# EAGLE board yaokewang_hw2_sch (EAGLE 9.3.0)
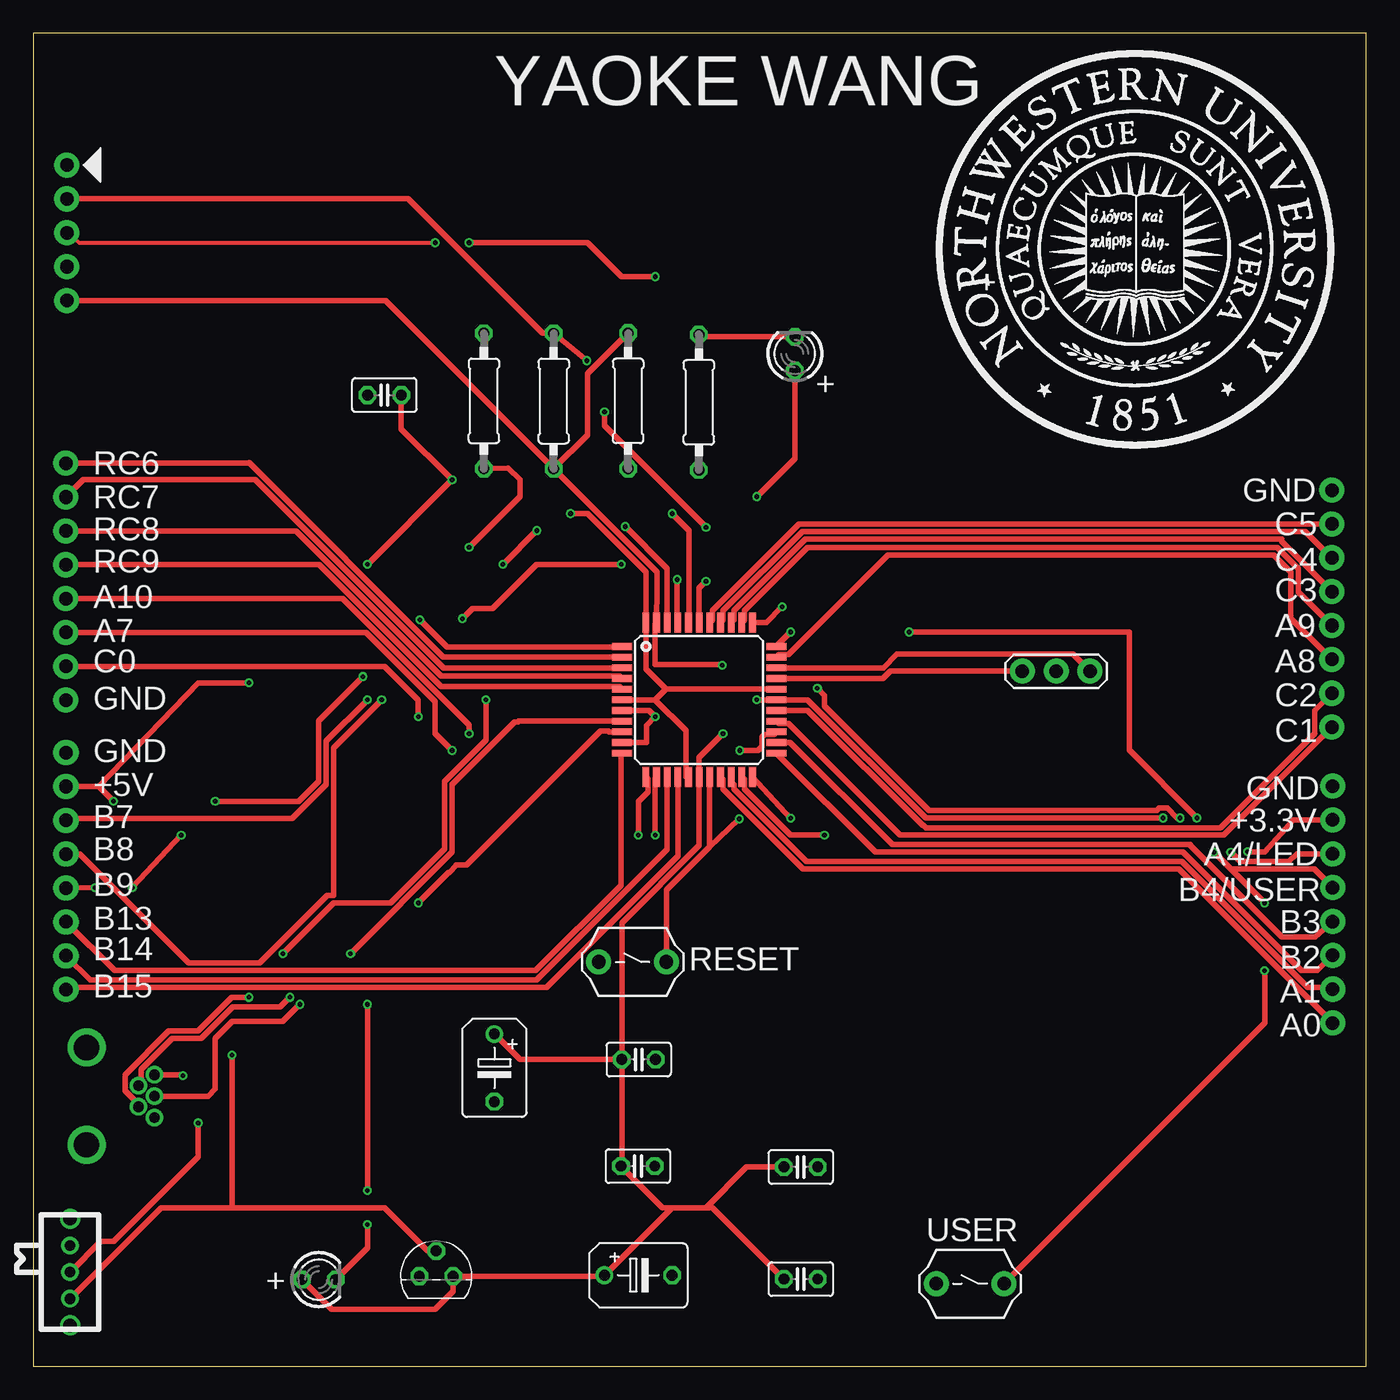
[diagram p0: board, top side]
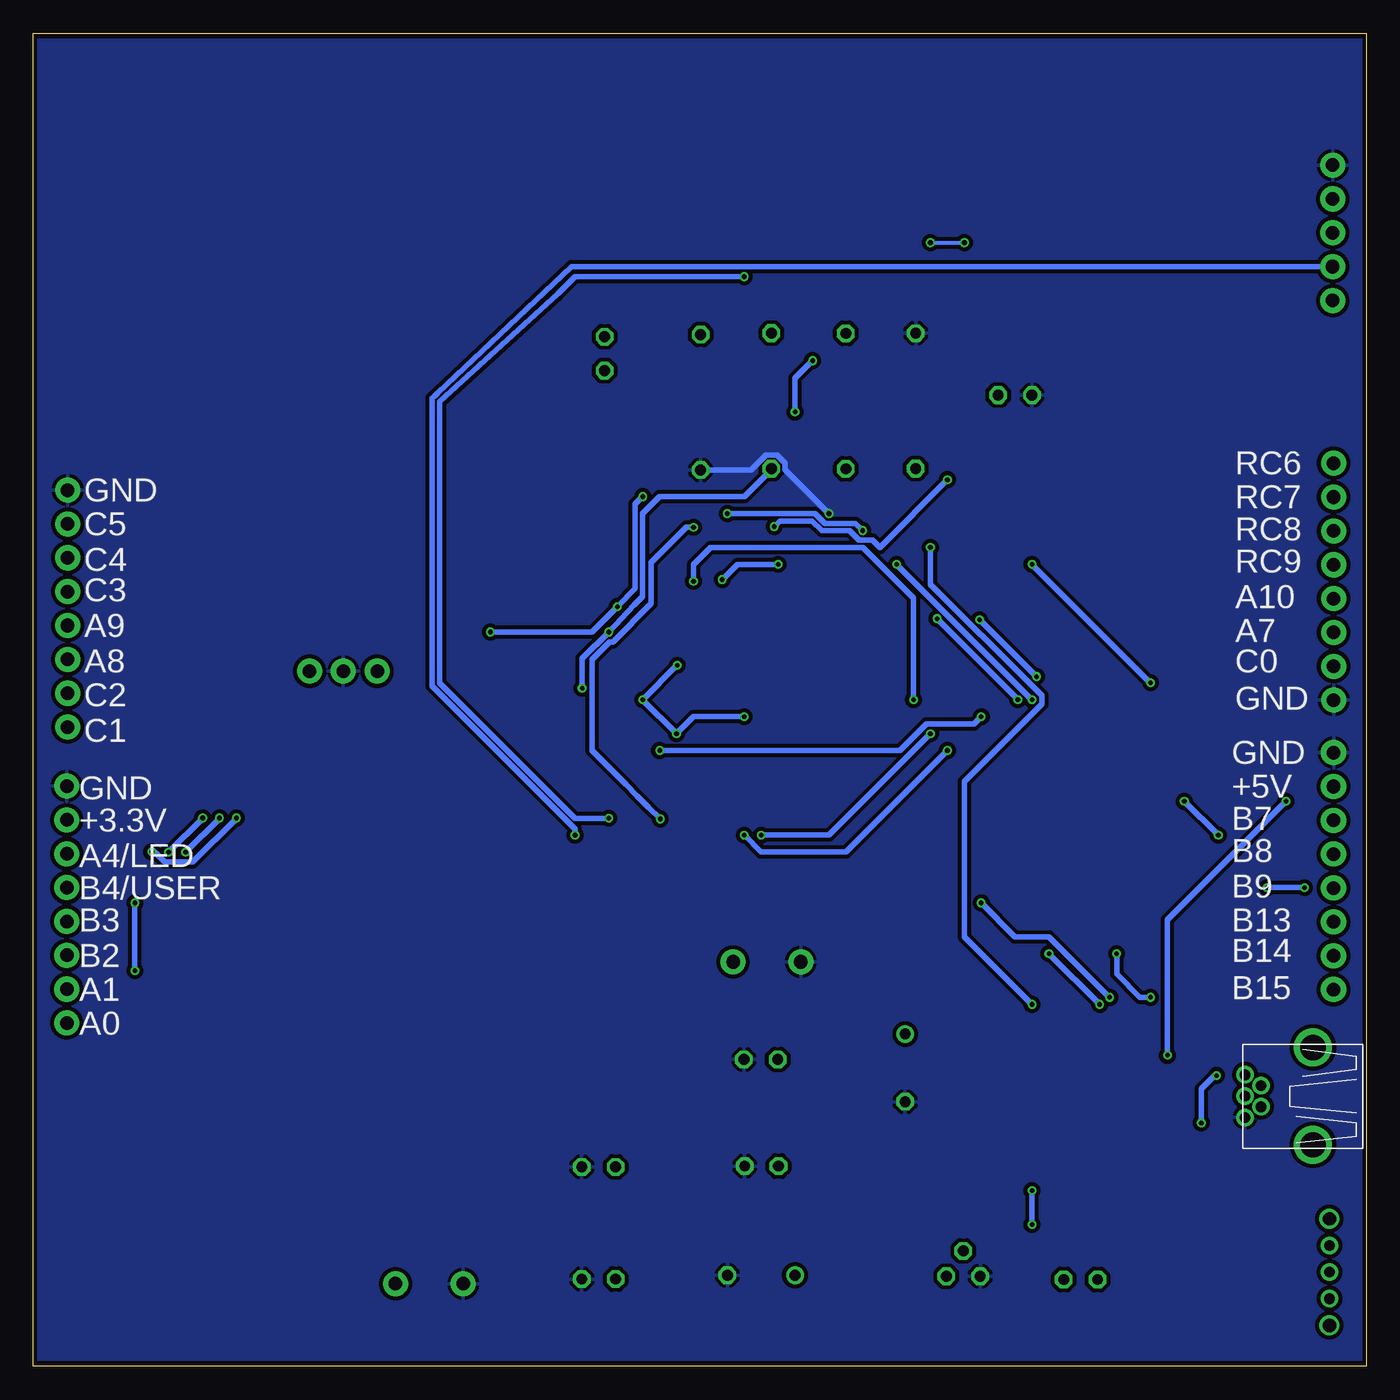
[diagram p1: board, bottom side, seen from below]

Size 100 x 100 mm. Coordinates in mm from the lower left corner, seen from the top.
Outline: 0,0 100,0 100,100 0,100 0,0
Copper layers (1*16): Top 0.035mm / dielectric 1.5mm / Bottom 0.035mm
Design rules "SeeedStudio_2layer_DRU_no_angle_20140221": minimum track width 6mil, minimum drill 12mil, track to track 6mil, track to pad 6mil, pad to pad 6mil, via to via 6mil, smd to smd 0mil, copper to edge 10mil, drill to drill 10mil, minimum pad ring 10mil, minimum via ring 6mil, stop-mask expansion 2mil, vias tented up to drill 100mil, thermal gap 10mil

## Footprints (pad centres in the part's own frame; a part is rotated, then mirrored left to right if it is on the bottom)
C025-025X050 = drill 0.813 octagon: 1 -1.27,0; 2 1.27,0
B45181B = drill 0.813: + -2.54,0 | drill 0.813 octagon: - 2.54,0
USB-MB-H = drill 0.8: D+ 5.1,0; D- 3.9,0.8; GND 5.1,-1.6; ID 3.9,-0.8; VBUS 5.1,1.6 | drill 1.9: P$6 0,-3.65; P$7 0,3.65
LED3MM = drill 0.813 octagon: A -1.27,0; K 1.27,0
0207/10 = drill 0.813 octagon: 1 -5.08,0; 2 5.08,0
TQFP44 = smd 1.5 x 0.5: 1 -5.8,4; 2 -5.8,3.2; 3 -5.8,2.4; 4 -5.8,1.6; 5 -5.8,0.8; 6 -5.8,0; 7 -5.8,-0.8; 8 -5.8,-1.6; 9 -5.8,-2.4; 10 -5.8,-3.2; 11 -5.8,-4; 23 5.8,-4; 24 5.8,-3.2; 25 5.8,-2.4; 26 5.8,-1.6; 27 5.8,-0.8; 28 5.8,0; 29 5.8,0.8; 30 5.8,1.6; 31 5.8,2.4; 32 5.8,3.2; 33 5.8,4 | smd 0.5 x 1.5: 12 -4,-5.8; 13 -3.2,-5.8; 14 -2.4,-5.8; 15 -1.6,-5.8; 16 -0.8,-5.8; 17 0,-5.8; 18 0.8,-5.8; 19 1.6,-5.8; 20 2.4,-5.8; 21 3.2,-5.8; 22 4,-5.8; 34 4,5.8; 35 3.2,5.8; 36 2.4,5.8; 37 1.6,5.8; 38 0.8,5.8; 39 0,5.8; 40 -0.8,5.8; 41 -1.6,5.8; 42 -2.4,5.8; 43 -3.2,5.8; 44 -4,5.8
SLIDE = drill 0.8: 1 -2,0; 2 0,0; 3 2,0 | drill 1: P$1 -4,0; P$2 4,0
TO92 = drill 0.813 octagon: 1 -1.27,0; 2 0,1.905; 3 1.27,0
PB = drill 1.016 pad 1.88: 1 -2.54,0; 3 2.54,0
1X08 = drill 1.016 pad 1.88: 1 0,0; 2 2.54,0; 3 5.08,0; 4 7.62,0; 5 10.16,0; 6 12.7,0; 7 15.24,0; 8 17.78,0
OSC = drill 1.016 pad 1.88: 1 -2.54,0; 2 0,0; 3 2.54,0
1X05 = drill 1.016 pad 1.88: 1 0,0; 2 2.54,0; 3 5.08,0; 4 7.62,0; 5 10.16,0

## Placement (x,y rotation side)
C1  0.1uF  [C025-025X050]  45.36,15.01 0 top
C2  0.1uF  [C025-025X050]  57.58,14.95 0 top
C3  0.1uF  [C025-025X050]  26.34,72.86 180 top
C4  0.1uF  [C025-025X050]  57.58,6.53 0 top
C5  10uF  [B45181B]  34.59,22.38 270 top
C6  10uF  [B45181B]  45.39,6.82 0 top
C7  0.1uF  [C025-025X050]  45.42,23.01 0 top
J1  USB-MB-H  [USB-MB-H]  3.99,20.26 0 top
LED1  RED  [LED3MM]  21.42,6.5 0 top
LED2  GREEN  [LED3MM]  57.14,75.97 90 top
R1  330  [0207/10]  33.8,72.42 270 top
R2  330  [0207/10]  49.93,72.32 90 top
R3  10k  [0207/10]  39.04,72.41 270 top
R4  10k  [0207/10]  44.63,72.42 90 top
U$1  PIC32MX270F256D  [TQFP44]  49.96,50 0 top
U$2  SLIDE  [SLIDE]  2.76,7.06 90 top
U$3  MCP1702  [TO92]  30.23,6.74 0 top
U$4  PBPB  [PB]  44.96,30.33 0 top
U$5  PBPB  [PB]  70.28,6.19 0 top
U$6  CONN_08  [1X08]  2.45,46.03 270 top
U$7  CONN_08  [1X08]  97.49,43.53 270 top
U$8  OSC  [OSC]  76.74,52.14 0 top
U$9  PICKIT3  [1X05]  2.51,90.12 270 top
U$10  CONN_08  [1X08]  97.43,65.73 270 top
U$11  CONN_08  [1X08]  2.44,49.97 90 top

## Library data of the parts
C1-C7 = Yaokewang_hw2_lbr; SPICEPREFIX: C
J1 LED1 LED2 U$1-U$11 = Yaokewang_hw2_lbr
R1-R4 = Yaokewang_hw2_lbr; SPICEPREFIX: R

## Nets
+3V3: C1.1 C2.1 C4.1 C5.+ C6.+ C7.1 LED1.A R3.2 R4.2 U$1.7 U$1.10 U$1.17 U$1.28 U$1.43 U$3.3 U$7.2 U$9.5
+5V: C3.1 U$1.42 U$2.1 U$3.2 U$6.2
A0: U$1.19 U$7.8
A1: U$1.20 U$7.7
A4/LED: LED2.A U$1.34 U$7.3
A7: U$1.13 U$11.3
A8: U$1.32 U$10.6
A9: U$1.35 U$10.5
A10: U$1.12 U$11.4
B2: U$1.23 U$7.6
B3: U$1.24 U$7.5
B4/USER: R4.1 U$1.33 U$5.3 U$7.4
B7: U$1.40 U$6.3
B8: U$1.41 U$6.4
B9: U$1.1 U$6.5
B13: U$1.11 U$6.6
B14: U$1.14 U$6.7
B15: U$1.15 U$6.8
D+: J1.D+ U$1.8
D-: J1.D- U$1.9
GND: C1.2 C2.2 C3.2 C4.2 C5.- C6.- C7.2 J1.GND R1.1 R2.1 U$1.6 U$1.16 U$1.29 U$1.44 U$3.1 U$4.1 U$5.1 U$6.1 U$7.1 U$8.2 U$9.1 U$10.1 U$11.1
MCLR: R3.1 U$1.18 U$4.3 U$9.2
N$1: J1.VBUS U$2.2
N$2: LED1.K R1.2
N$3: LED2.K R2.2
N$4: U$1.30 U$8.1
N$5: U$1.31 U$8.3
PGC: U$1.22 U$9.3
PGD: U$1.21 U$9.4
RC0: U$1.25 U$11.2
RC1: U$1.26 U$10.8
RC2: U$1.27 U$10.7
RC3: U$1.36 U$10.4
RC4: U$1.37 U$10.3
RC5: U$1.38 U$10.2
RC6: U$1.2 U$11.8
RC7: U$1.3 U$11.7
RC8: U$1.4 U$11.6
RC9: U$1.5 U$11.5
USBID: J1.ID U$1.39

## Tracks (layer width: path | path; a pad name or v marks a point on that pad's centre or on a via)
+3V3  (via drill 0.35)
  Top 0.406: C7.1 44.15,33.27 49.96,39.08 U$1.17 49.96,45.68 v51.74,47.46 | C7.1 44.15,15.07 C1.1 47.2,11.9 47.93,11.9 | C2.1 53.52,14.95 50.47,11.9 | 50.47,11.9 47.93,11.9 | 47.93,11.9 C6.+ 42.77,6.74 U$3.3 31.5,5.63 30.15,4.28 22.37,4.28 LED1.A | 50.47,11.9 50.95,11.9 C4.1 | U$7.2 94.92,40.98 94.54,40.98 92.38,38.57 91.11,38.57 v91.11,38.59 | v84.76,41.13 66.96,41.13 58.09,50 U$1.28 v54.28,50 | R3.2 41.58,69.87 41.58,74.45 R4.2 | U$9.5 26.41,79.95 R3.2 | C7.1 36.5,23.01 C5.+ | U$1.10 46,46.8 46,48.07 v46.66,48.73 46.19,49.2 U$1.7 | R3.2 46.79,59.58 46.79,58.51 U$1.43 46.66,55.7 46.66,52.64 51.64,52.64 v51.69,52.59
  Bottom 0.406: v91.11,38.59 90.9,38.59 90.14,37.84 88.03,37.84 84.76,41.11 v84.76,41.13 | v51.69,52.59 v54.28,50 v51.74,47.46 50.47,48.73 v46.66,48.73
+5V  (via drill 0.35)
  Top 0.406: U$2.1 9.6,11.9 14.91,11.9 | U$3.2 29.59,8.65 26.34,11.9 14.91,11.9 | U$6.2 4.91,43.49 | 4.91,43.49 v6.02,42.38 | v14.91,23.33 14.91,11.9 | 4.91,43.49 12.37,51.27 v16.18,51.27 | v44.41,62.99 47.56,59.84 U$1.42 | v25.07,60.16 v31.42,66.51 27.61,70.32 C3.1
  Bottom 0.406: v6.02,42.38 14.91,33.49 v14.91,23.33 | v44.41,62.99 43.99,63.41 41.58,63.41 40.84,62.68 38.78,62.68 38.07,61.97 37.04,61.97 36.5,61.43 v31.42,66.51 | v16.18,51.27 v25.07,60.16
A0
  Top 0.406: U$7.8 85.93,37.3 57.76,37.3 51.76,43.3 51.76,44.01 U$1.19
A1
  Top 0.406: U$1.20 52.36,43.84 52.56,43.65 52.56,43.3 58,37.86 86.16,37.86 95.61,28.41 97.36,28.41 U$7.7
A4/LED  (via drill 0.35)
  Top 0.406: U$7.3 94.8,38.45 94.21,37.86 90.55,37.86 v89.84,38.57 | v87.3,41.13 82.22,46.21 82.22,55.08 v65.71,55.08 | U$1.34 55,55.8 v56.19,56.98 | v54.28,65.24 57.14,68.1 LED2.A
  Bottom 0.406: v89.84,38.57 87.3,41.11 v87.3,41.13 | v65.71,55.08 58.09,55.08 v56.19,56.98 54.84,58.33 54.84,64.68 v54.28,65.24
A7  (via drill 0.35)
  Top 0.406: U$11.3 24.96,55.05 30.15,49.86 30.15,47.46 v31.42,46.19 | U$1.13 46.66,44.1 v46.66,39.84
  Bottom 0.406: v31.42,46.19 39.04,38.57 45.39,38.57 v46.66,39.84
A8
  Top 0.406: U$10.6 94.36,56.09 94.36,59.59 93.08,60.87 64.14,60.87 56.66,53.39 55.96,53.39 U$1.32
A9
  Top 0.406: U$10.5 94.92,58.08 94.92,59.83 93.32,61.43 58.09,61.43 53.36,56.7 53.36,55.99 U$1.35
A10  (via drill 0.35)
  Top 0.406: U$11.4 23.21,57.59 32.69,48.11 v32.69,47.46 | v45.39,39.84 45.39,42.38 46.1,43.09 46.1,44.06 U$1.12
  Bottom 0.406: v45.39,39.84 40.31,39.84 v32.69,47.46
B2
  Top 0.406: U$1.23 55.76,45.98 63.17,38.57 86.25,38.57 95.14,29.68 96.34,29.68 U$7.6
B3
  Top 0.406: U$1.24 56.77,46.8 64.44,39.13 86.8,39.13 86.8,39.07 93.65,32.22 96.19,32.22 U$7.5
B4/USER  (via drill 0.35)
  Top 0.406: U$7.4 96.09,37.3 89.84,37.3 | 89.84,37.3 v88.57,38.57 | v86.03,41.13 85.8,41.13 85.06,41.87 84.46,41.87 84.28,41.69 67.19,41.69 59.36,49.52 59.36,50.33 v58.82,50.87 | v56.82,55.08 55.76,54.02 U$1.33 | U$5.3 92.38,25.74 v92.38,29.68 | v92.38,34.76 89.84,37.3
  Bottom 0.406: v86.03,41.13 86.03,41.11 v88.57,38.57 | v92.38,29.68 v92.38,34.76 | R4.1 44.63,67.27 46.66,65.24 53.01,65.24 54.28,63.97 54.28,57.75 54.91,57.11 v56.82,55.08 58.82,53.08 v58.82,50.87
B7  (via drill 0.35)
  Top 0.406: U$1.40 49.2,55.84 49.2,62.7 v47.93,63.97 | U$6.3 2.6,41.11 19.43,41.11 21.97,43.65 21.97,46.9 v25.07,50 | v37.77,62.7 v35.23,60.16
  Bottom 0.406: v35.23,60.16 v25.07,50 | v47.93,63.97 41.35,63.97 40.61,63.24 38.31,63.24 v37.77,62.7
B8  (via drill 0.35)
  Top 0.406: U$6.4 3.48,38.41 11.66,30.24 16.97,30.24 22.05,35.32 22.53,35.32 22.53,46.39 v26.14,50 | v44.12,60.16 37.77,60.16 34.45,56.84 32.95,56.84 v32.19,56.09 | v48.31,59.02 48.31,55.85 U$1.41
  Bottom 0.406: v48.31,59.02 47.17,60.16 v44.12,60.16 | v32.19,56.09 26.14,50.03 v26.14,50
B9  (via drill 0.35)
  Top 0.406: U$6.5 v4.62,35.9 | v7.42,35.9 v11.1,39.84 | v13.64,42.38 19.91,42.38 21.41,43.88 21.41,48.42 v24.73,51.74 | U$1.1 44.1,53.94 31.06,53.94 v29.01,55.99
  Bottom 0.406: v4.62,35.9 v7.42,35.9 | v11.1,39.84 v13.64,42.38 | v24.73,51.74 28.98,55.99 v29.01,55.99
B13
  Top 0.406: U$6.6 6.1,29.68 37.69,29.68 44.08,36.07 44.08,45.92 U$1.11
B14
  Top 0.406: U$1.14 47.56,38.76 37.77,28.97 4.28,28.97 U$6.7
B15
  Top 0.406: U$1.15 48.36,38.27 38.5,28.41 2.6,28.41 U$6.8
D+  (via drill 0.35)
  Top 0.406: J1.D+ 13.11,20.26 13.64,20.79 13.64,24.6 14.91,25.87 18.72,25.87 v19.99,27.14 | U$1.8 36.42,48.4 36.37,48.35 36.12,48.35 31.42,43.65 31.42,38.57 v23.8,30.95
  Bottom 0.406: v19.99,27.14 v23.8,30.95
D-  (via drill 0.35)
  Top 0.406: J1.D- 8.08,21.25 8.08,22.28 10.4,24.6 12.6,24.6 14.94,26.94 18.52,26.94 19.24,27.66 v19.24,27.68 | v28.88,34.76 31.16,37.04 31.22,37.04 31.73,37.55 31.73,37.61 32.5,37.61 42.55,47.66 43.15,47.66 43.21,47.6 U$1.9
  Bottom 0.406: v19.24,27.68 19.26,27.68 23.8,32.22 26.34,32.22 v28.88,34.76
GND  (via drill 0.35)
  Top 0.406: U$1.16 48.97,44.2 48.97,47.69 46.66,50 | U$1.6 46.66,50 | U$1.29 47.46,50.8 | 47.46,50.8 46.66,50 | 47.46,50.8 45.96,52.3 U$1.44 45.96,59.59 41.58,63.97 v40.31,63.97
  Bottom 0.406: R2.1 46.17,67.24 45.05,68.36 44.21,68.36 43.61,67.76 43.61,67.27 v40.31,63.97
  pour Bottom (isolate 0.305): -0.33,99.53 100,99.53 100,0.47 0.94,0.47 -0.33,0.47
MCLR  (via drill 0.35)
  Top 0.406: U$4.3 47.5,35.73 50.72,38.95 | 50.72,38.95 50.72,44.16 U$1.18 | U$9.2 28.14,87.58 38.22,77.49 R3.1 v41.53,75.45 | v42.85,71.59 42.85,70.56 v50.47,62.94 | 50.72,38.95 v52.96,41.06
  Bottom 0.406: v41.53,75.45 42.85,74.13 v42.85,71.59 | v52.96,41.06 arc3 55.55,43.65 58.09,46.19 58.09,53.02 56.76,54.35 56.52,54.35 53.65,57.22 53.65,60.29 50.99,62.94 v50.47,62.94
N$1  (via drill 0.35)
  Top 0.406: U$2.2 5.06,9.36 6.02,9.36 12.37,15.71 v12.37,18.25 | v11.23,21.81 11.17,21.86 J1.VBUS
  Bottom 0.406: v12.37,18.25 12.37,20.79 11.35,21.81 v11.23,21.81
N$2  (via drill 0.35)
  Top 0.406: LED1.K 25.07,8.88 v25.07,10.63 | v25.07,13.17 v25.07,27.14 | R1.2 35.61,67.4 36.5,66.51 36.5,65.24 v32.69,61.43
  Bottom 0.406: v25.07,10.63 v25.07,13.17 | v25.07,27.14 30.15,32.22 30.15,43.88 24.34,49.7 24.34,50.3 28.88,54.85 28.9,54.85 32.69,58.64 v32.69,61.43
N$3
  Top 0.406: LED2.K 50.09,77.24 R2.2
N$4
  Top 0.406: U$8.1 64.29,52.14 63.75,51.6 U$1.30
N$5
  Top 0.406: U$1.31 63.76,52.4 64.8,53.44 77.98,53.44 U$8.3
PGC  (via drill 0.35)
  Top 0.305: U$9.3 3.48,84.29 v30.15,84.29
  Top 0.406: U$1.22 v56.82,41.11 | v46.66,81.75 44.12,81.75 41.58,84.29 v32.69,84.29
  Bottom 0.305: v32.69,84.29 v30.15,84.29
  Bottom 0.406: v56.82,41.11 59.36,41.11 69.52,51.27 69.52,72.38 60.63,80.48 59.36,81.75 v46.66,81.75
PGD  (via drill 0.35)
  Top 0.406: U$1.21 53.36,44.01 53.36,43.3 53.56,43.09 53.57,43.09 56.82,39.84 v59.36,39.84
  Bottom 0.406: U$9.4 53.76,82.5 59.61,82.51 69.66,73.01 69.74,72.94 69.75,72.94 69.91,72.78 70.07,72.64 70.07,72.62 70.08,72.61 70.08,72.39 70.09,72.17 70.08,72.16 70.08,51.04 59.36,40.32 v59.36,39.84
RC0  (via drill 0.35)
  Top 0.406: U$11.2 26.37,52.51 28.88,50 v28.88,48.73 | v53.01,46.19 54.35,46.19 54.66,46.49 54.66,47.2 54.87,47.41 55.57,47.41 U$1.25
  Bottom 0.406: v53.01,46.19 35,46.19 32.99,48.19 29.42,48.19 v28.88,48.73
RC1
  Top 0.406: U$10.8 89.32,39.84 65.03,39.84 56.66,48.21 55.96,48.21 U$1.26
RC2
  Top 0.406: U$10.7 96.13,49.19 96.13,47.46 89.07,40.4 66.98,40.4 66.81,40.57 66.73,40.57 58.1,49.2 U$1.27
RC3
  Top 0.406: U$10.4 93.65,61.89 93.65,62.07 57.93,62.07 52.56,56.7 52.56,55.99 U$1.36
RC4
  Top 0.406: U$10.3 95.45,62.63 57.69,62.63 51.76,56.7 51.76,55.99 U$1.37
RC5
  Top 0.406: U$1.38 50.96,55.99 50.96,56.7 57.45,63.19 U$10.2
RC6
  Top 0.406: U$11.8 16.15,67.75 16.18,67.78 30.76,53.2 U$1.2
RC7
  Top 0.406: U$11.7 3.75,66.51 16.66,66.51 30.77,52.4 U$1.3
RC8
  Top 0.406: U$11.6 19.71,62.67 30.58,51.79 43.97,51.79 U$1.4
RC9
  Top 0.406: U$11.5 21.46,60.13 30.59,50.99 43.97,50.99 U$1.5
USBID  (via drill 0.35)
  Top 0.406: v16.18,27.68 14.89,27.68 12.37,25.16 10.17,25.16 6.88,21.87 6.88,20.64 7.89,19.63 J1.ID | v18.72,30.95 22.53,34.76 26.82,34.76 30.86,38.8 30.86,43.88 33.96,46.98 v33.96,50 | U$1.39 49.96,58.38 v50.47,58.89
  Bottom 0.406: v18.72,30.95 18.72,29.43 16.97,27.68 v16.18,27.68 | v33.96,50 33.96,57.62 37.75,61.41 38.3,61.41 38.33,61.43 49.2,61.43 50.47,60.16 v50.47,58.89

## Text on the board
tPlace: + | + | RC6 | GND | RC7 | RC8 | C5 | RC9 | C4 | A10 | C3 | A9 | A7 | C0 | A8 | GND | C2 | C1 | GND | +5V | GND | B7 | +3.3V | B8 | A4/LED | B9 | B4/USER | B13 | B3 | B14 | RESET | B2 | B15 | A1 | A0 | USER | +
bPlace: RC6 | GND | RC7 | RC8 | C5 | RC9 | C4 | A10 | C3 | A9 | A7 | C0 | A8 | GND | C2 | C1 | GND | +5V | GND | B7 | +3.3V | B8 | A4/LED | B9 | B4/USER | B13 | B3 | B14 | B2 | B15 | A1 | A0
tNames: YAOKE WANG
200bmp: C:/Users/Neolithic/Desktop/Me433/hw2/433.bmp